# Altium PCB projet_pcb_naked_g431.PCBDOC
Units mil, origin at the board's own origin, x right, y up, seen from the top; angles counter-clockwise.
Board outline 2785 x 2050 mil, 2 copper layers (TopLayer, BottomLayer); 41 components, 32 nets, 152 pads, 42 vias.
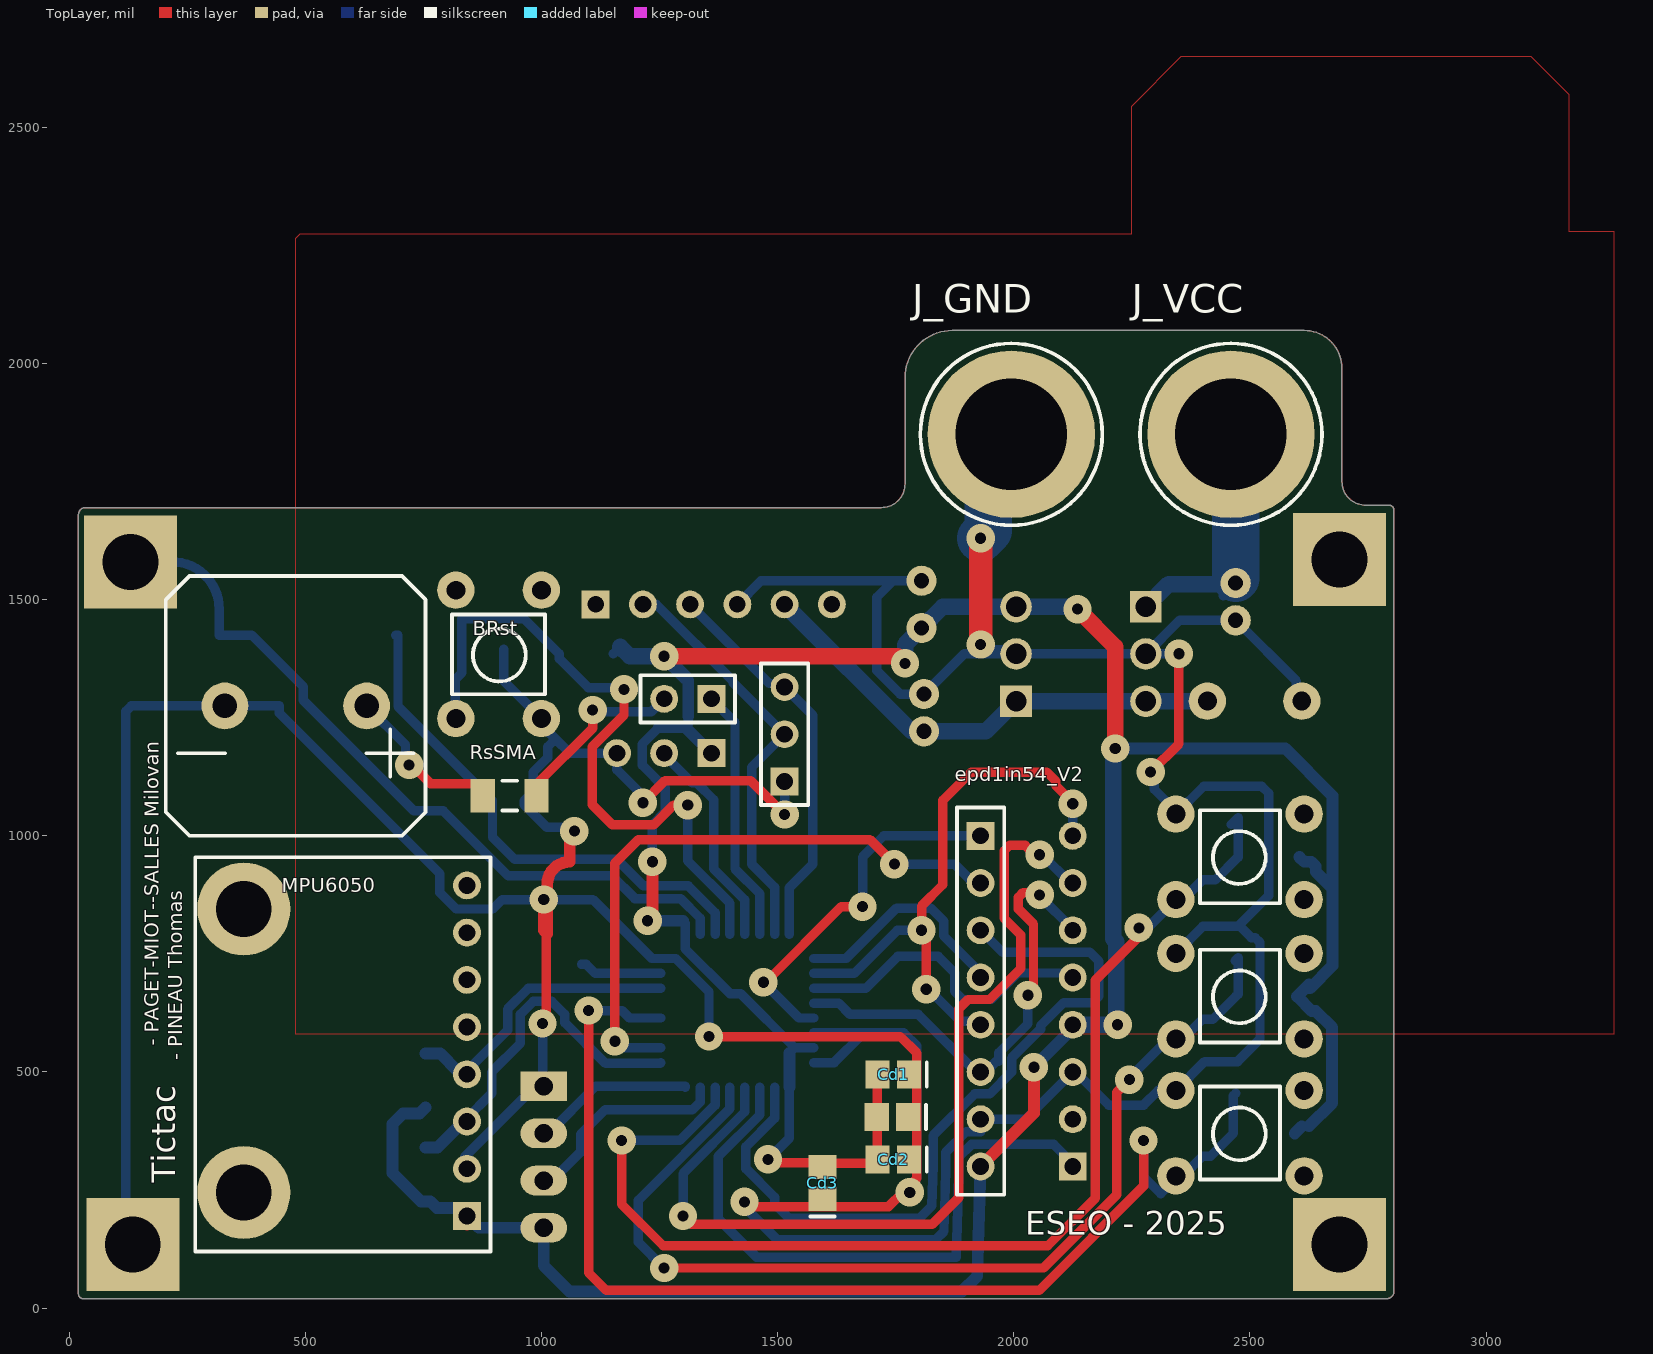
[diagram p0: TopLayer view]
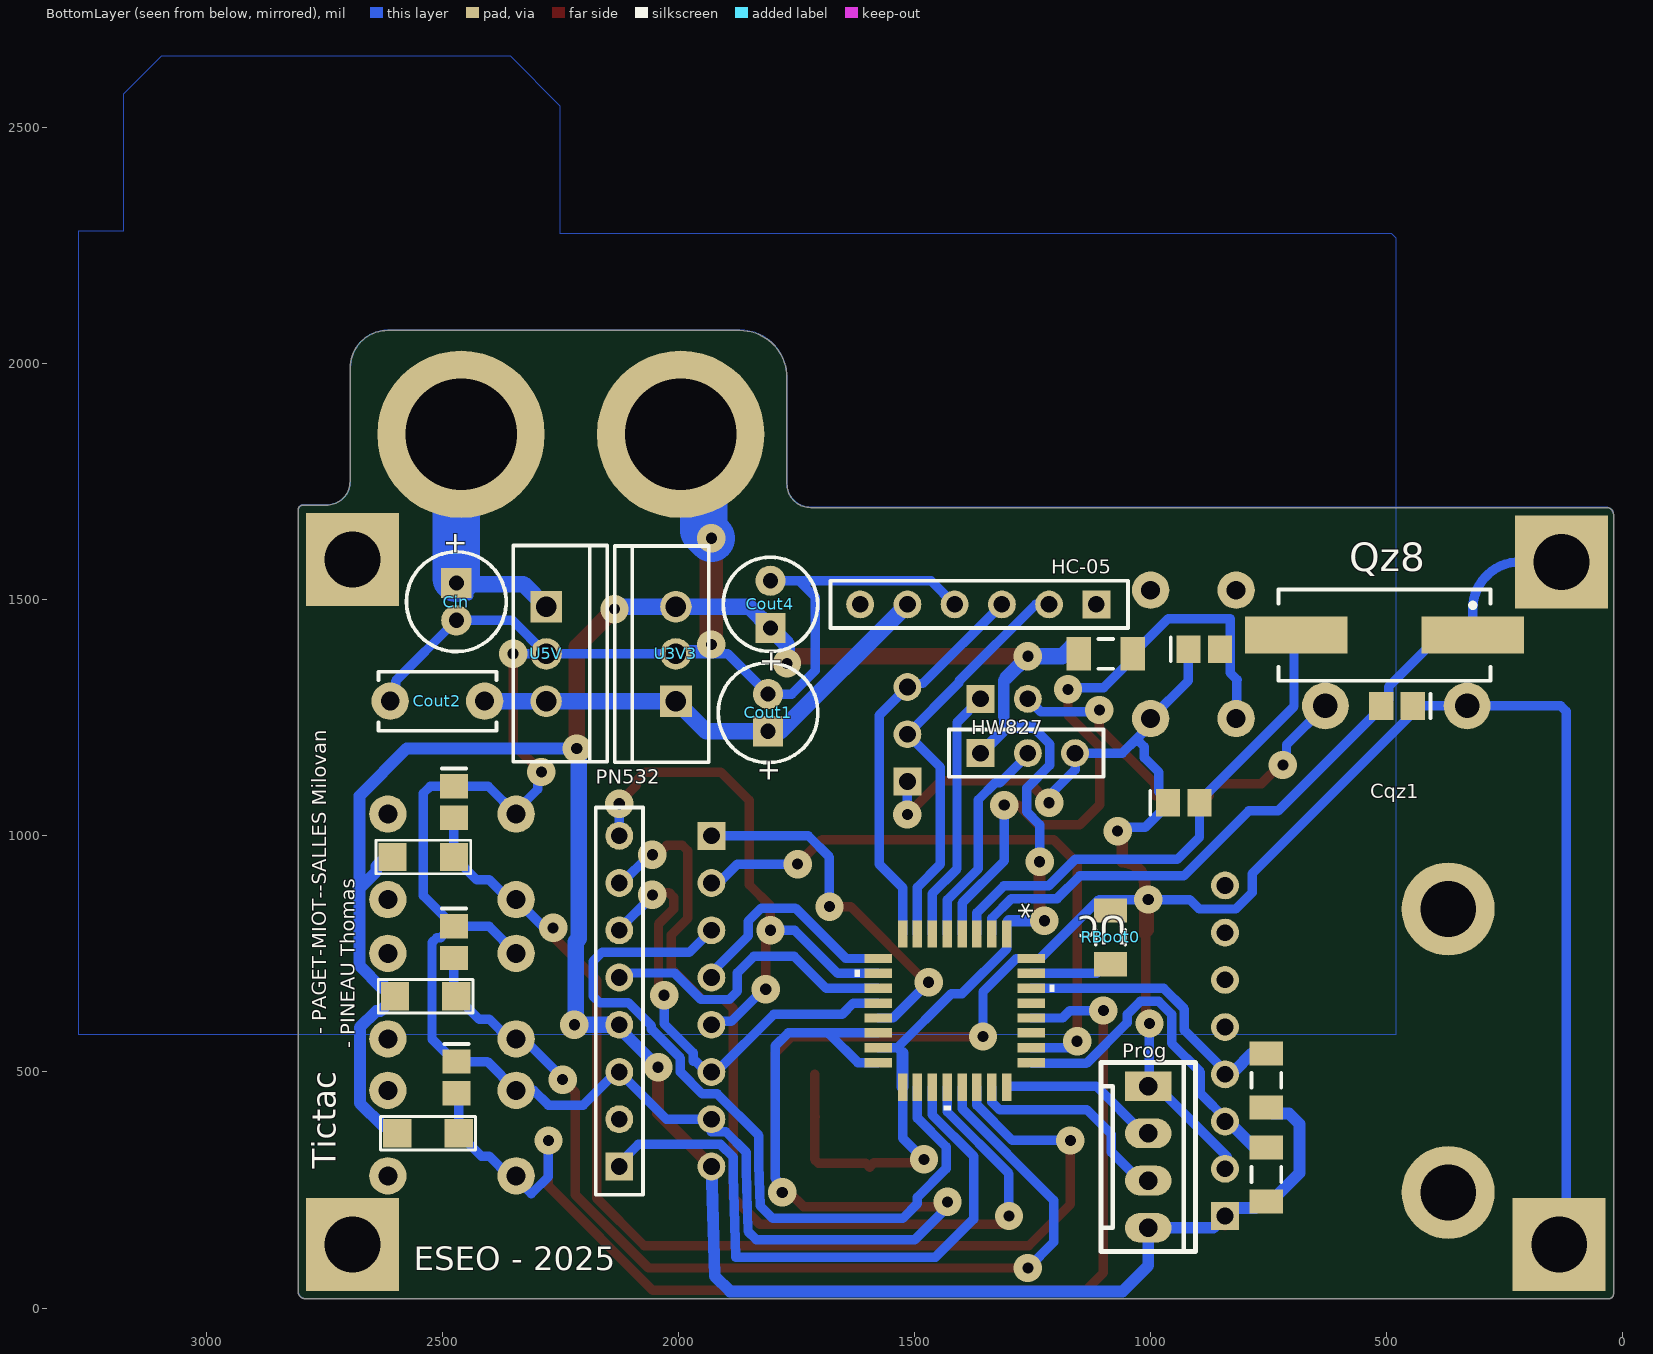
[diagram p1: BottomLayer view, seen from below]
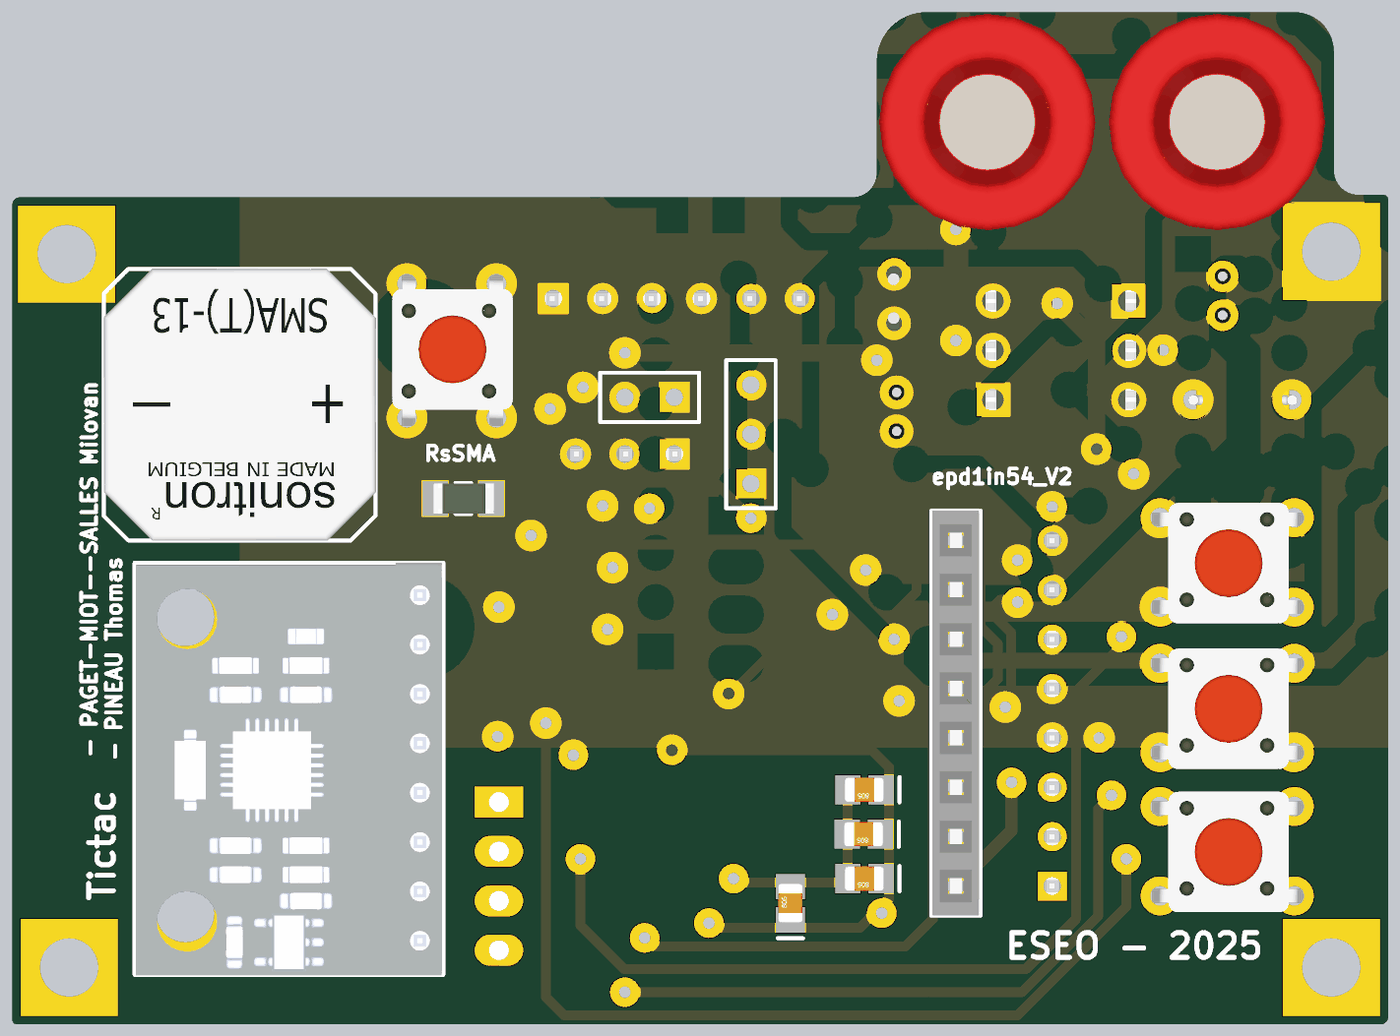
[diagram p2: 3D render of the assembled board from above, using the file's embedded part models]
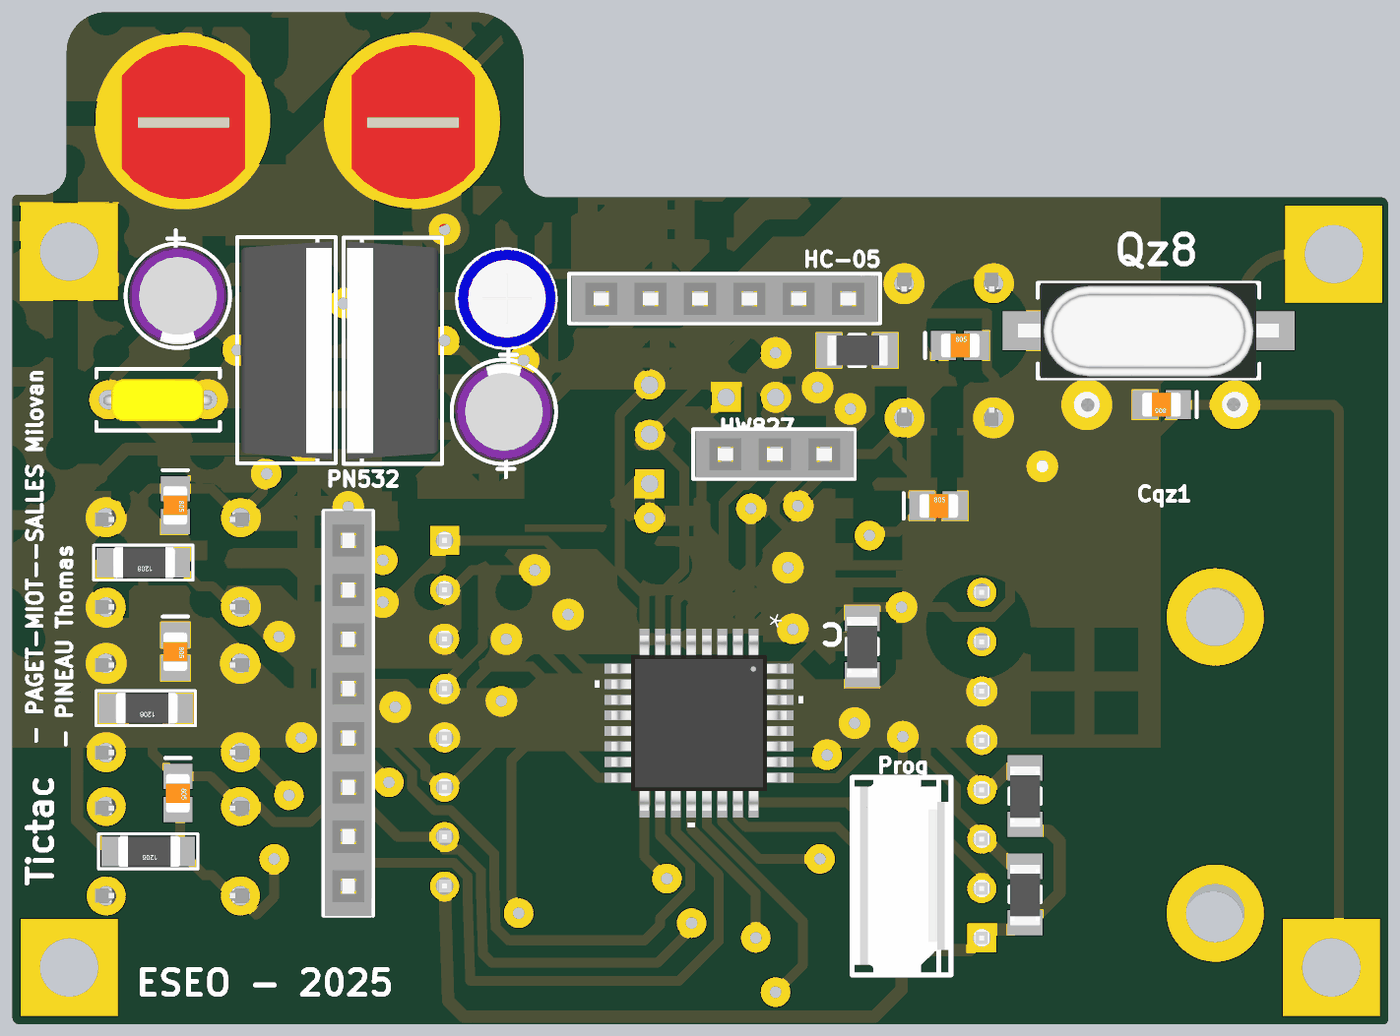
[diagram p3: 3D render of the assembled board from below, using the file's embedded part models]

## Layer stack, top to bottom
TopSolder: solder mask 0.4, Solder Resist, Dk 3.5
TopLayer: signal copper 1.4
Dielectric1: core 12.6, FR-4, Dk 4.8
BottomLayer: signal copper 1.4
BottomSolder: solder mask 0.4, Solder Resist, Dk 3.5

## Board outline
1720,1695 ccw(c1720,1745) 1770,1745 1770,1970 cw(c1870,1970) 1870,2070 2615,2070 cw(c2615,1990) 2695,1990 2695,1750 ccw(c2745,1750) 2745,1700 2795,1700 cw(c2795,1690) 2805,1690 2805,35 cw(c2790,35) 2790,20 30,20 cw(c30,30) 20,30 20,1680 cw(c35,1680) 35,1695

## Design rules (kind name [scope] priority, off if disabled: settings)
Clearance PowerPlaneClearance [InNamedPolygon('Bot-GND') Or  InNamedPolygon('Top-GND')] p1: gap=10 ignorepadtopadclearanceinfootprint=FALSE
Clearance [All] p2: gap=7 ignorepadtopadclearanceinfootprint=TRUE
FabricationTestPointUsage TestPointUsage [All] p1: valid=0 allowmultiple=FALSE
FabricationTestpoint Testpoint [All] p1: side=3 testpointundercomponent=TRUE minsize=40 maxsize=100 preferedsize=60 minholesize=20 maxholesize=40 preferedholesize=32 testpointgrid=1 allowsidetop=TRUE allowsidebottom=TRUE usegrid=TRUE gridtolerance=0.01
Height [All] p1: minheight=0 maxheight=2000 prefheight=500
HoleSize [All] p1: absolutevalues=TRUE maxlimit=300 minlimit=11.81 maxpercent=80.000 minpercent=20.000
PlaneClearance [All] p1: clearance=40
PlaneConnect [All] p1: planeconnectstyle=Relief reliefexpansion=19.68 reliefentries=4 reliefconductorwidth=40 reliefairgap=19.68
PolygonConnect [All] p1: connectstyle=Relief reliefconductorwidth=40 reliefentries=4 polygonreliefangle="90 Angle" airgapwidth=10
RoomDefinition projet_pcb_naked_g431 [InComponentClass('projet_pcb_naked_g431')] p1: confinementstyle=ConfineIn formatcopy=TRUE lockcomponents=FALSE outline 4610,-485 5950,-485 5950,-580 4610,-580
RoutingVias [All] p1: holewidth=23.62 width=60 viastyle="Through Hole" minholewidth=23.62 minwidth=60 maxholewidth=23.62 maxwidth=60
SilkToSolderMaskClearance SilkscreenOverComponentPads [IsPad] p1: minsilkscreentomaskgap=10 clearancetoexposedcopper=TRUE
SolderMaskExpansion [All] p1: expansion=2
Width [All] p1: maxlimit=1000 minlimit=12 preferedwidth=40
23 further rules are at their usual default settings.

## Classes and differential pairs
component class projet_pcb_naked_g431: BRst Cd1 Cd2 Cd3 Cin Cout1 Cout2 Cout4 Cqz1 epd1in54_V2 HC-05 HW827 J_GND J_VCC PN532 Prog Qz8 RBoot0 U5V Uc

## Components (designator, comment, footprint, x,y, rotation, side; value= is the part's Value field where it differs from the comment)
B0 "BOUTON_POUSSOIR_MINIATURE_TRAVERSANT" BOUTON_POUSSE_PLAT_6x6 2327.6,1053.98 r270 top
B1 "BOUTON_POUSSOIR_MINIATURE_TRAVERSANT" BOUTON_POUSSE_PLAT_6x6 2327.6,758.98 r270 top
B2 "BOUTON_POUSSOIR_MINIATURE_TRAVERSANT" BOUTON_POUSSE_PLAT_6x6 2327.6,468.98 r270 top
BRst "BOUTON_POUSSOIR_MINIATURE_TRAVERSANT" BOUTON_POUSSE_PLAT_6x6 811.02,1232.6 r0 top
CB0 "Condensateur 0805" C0805_N 2475,1071.54 r270 bottom value=100nF
CB1 "Condensateur 0805" C0805_N 2475,775 r270 bottom value=100nF
CB2 "Condensateur 0805" C0805_N 2470,488.46 r270 bottom value=100nF
Cd1 "Condensateur 0805" C0805_N 1745,495 r180 top value=100nF
Cd2 "Condensateur 0805" C0805_N 1745,315 r180 top value=100nF
Cd3 "Condensateur 0805" C0805_N 1595,265 r90 top value=100nF
CdRst "Condensateur 0805" C0805_N 886.54,1395 r180 bottom value=100nF
CdSWD "Condensateur 0805" C0805_N 1743.46,405 r180 top value=100nF
Cin "CONDENSATEUR_POL_ELECTROLY_RAD_2.0/5.08" CONDENSATEUR_POLARISE_ELECTROLYTIQUE_RADIAL_2.0/5.08 2470,1495.63 r270 bottom value=10µF/>25V
Cout1 "CONDENSATEUR_POL_ELECTROLY_RAD_2.0/5.08" CONDENSATEUR_POLARISE_ELECTROLYTIQUE_RADIAL_2.0/5.08 1810,1260.63 r90 bottom value=1µF/>10V
Cout2 "CONDENSATEUR_CER_RAD_5.08" CONDENSATEUR_CERAMIQUE_RADIAL_5.08 2610,1285 r180 bottom value=100nF
Cout4 "CONDENSATEUR_POL_ELECTROLY_RAD_2.54/5.08" CONDENSATEUR_POLARISE_ELECTROLYTIQUE_RADIAL_2.54/5.08 1805,1440 r90 bottom value=4.7µF/63V
Cqz1 "Condensateur 0805" C0805_N 478.46,1275 r0 bottom value=20pF
Cqz2 "Condensateur 0805" C0805_N 930,1070 r180 bottom value=20pF
epd1in54_V2 "BARRETTE_8 CONTACTS_1 RANGEE_FEMELLE_DROITE" BARRETTE_8_F_D 1930,1000 r270 top
HC-05 "BARRETTE_6 CONTACTS_1 RANGEE_FEMELLE_DROITE" BARRETTE_6_F_D 1115,1490 r0 bottom
HW827 "BARRETTE 3 CONTACTS 1 RANGEE FEMELLE DROITE" BARRETTE_3_F_D 1360,1175 r180 bottom
J_GND "DOUILLE BANANE 4mm" DOUILLE_BANANE_4mm 1995,1850 r270 top
J_VCC "DOUILLE BANANE 4mm" DOUILLE_BANANE_4mm 2460,1850 r270 top
MPU6050 "MPU6050" MPU6050 842.44,195 r270 top
PN532 "BARRETTE_8 CONTACTS_1 RANGEE_FEMELLE_DROITE" BARRETTE_8_F_D 2125,300 r90 bottom
Prog "BARRETTE4" HE14_4 1005,470 r270 bottom
Psma13 "Jumper SIP 2.54" HDR1X2 1360,1290 r180 top
Qz8 "Hz" HC49/4H_SMX 505,1425 r0 bottom
RBoot0 "100k" R1206_N 1085,785 r270 bottom
RpuB0 "RESISTANCE_CMS_1206" RESISTANCE_CMS_1206 2475,955 r0 bottom value=10k
RpuB1 "RESISTANCE_CMS_1206" RESISTANCE_CMS_1206 2470,660 r0 bottom value=10k
RpuB2 "RESISTANCE_CMS_1206" RESISTANCE_CMS_1206 2465,370 r0 bottom value=10k
RpuSCL "4.7k" R1206_N 755,282.91 r270 bottom
RpuSDA "4.7k" R1206_N 755,482.09 r270 bottom
Rrst "10k" R1206_N 1095,1385 r180 bottom
RsSMA "220" R1206_N 932.91,1085 r0 top
SMA13 "BUZZER_SMA13" BUZZER_SMA13 630,1275 r180 top value=SMA13
U3V3 "REGULATEUR_TO220_78XX" REGULATEUR_TO220_78XX 2005,1385 r90 bottom
U5V "REGULATEUR_TO220_78XX" REGULATEUR_TO220_78XX 2280,1385 r270 bottom
UART2 "BARRETTE3" HDR1X3 1515,1115 r90 top
Uc "STM32G431KBTx" LQFP-32 1415,630 r270 bottom value=Value

## Footprints (in the part's own frame and the unit in brackets; to place one, negate y for a bottom-side part, rotate by r counter-clockwise, add the part's x,y. Pads: shape width x height; smd on the part's side, far side on the other; paste and mask are expansions set on the pad)
BARRETTE_3_F_D [mm] "BARRETTE 3 CONTACTS ; 1 RANGEE ; DROITE ; FEMELLE ; ESPACEMENT BROCHES = 2.54 mm"
  rect 1.5x1.5 hole 0.9: 1(0,0)
  round 1.5 hole 0.9: 2(2.54,0) 3(5.08,0)
  silkscreen extent -1.7,-1.27 6.61,1.27, body extent -1.56,-1.21 6.56,1.2, height 8.5
BARRETTE_6_F_D [mm] "BARRETTE 6 CONTACTS ; 1 RANGEE ; DROITE ; FEMELLE ; ESPACEMENT BROCHES = 2.54 mm"
  rect 1.5x1.5 hole 0.9: 1(0,0)
  round 1.5 hole 0.9: 2(2.54,0) 3(5.08,0) 4(7.62,0) 5(10.16,0) 6(12.7,0)
  silkscreen extent -1.7,-1.27 14.3,1.27, body extent -1.57,-1.2 14.17,1.21, height 8.5
BARRETTE_8_F_D [mm] "BARRETTE 8 CONTACTS ; 1 RANGEE ; DROITE ; FEMELLE ; ESPACEMENT BROCHES = 2.54 mm"
  rect 1.5x1.5 hole 0.9: 1(0,0)
  round 1.5 hole 0.9: 2(2.54,0) 3(5.08,0) 4(7.62,0) 5(10.16,0) 6(12.7,0) 7(15.24,0) 8(17.78,0)
  silkscreen extent -1.53,-1.27 19.3,1.27, body extent -1.53,-1.21 19.3,1.2, height 8.5
BOUTON_POUSSE_PLAT_6x6 [mil] "BOUTON POUSSOIR MINIATURE ON/OFF; BOUTON PLAT/LONG ; ESPACEMENT BROCHES = 7.62mm/5.08mm"
  round 79 hole 40: 1(7.87,15.75) 2(188.98,15.75) 3(188.98,287.4) 4(7.87,287.4)
  silkscreen extent 0,67 197,236, body extent -22,-1 222,310, height 276
BUZZER_SMA13 [mil] "BUZZER SMA13 ; DIMENSIONS :13.96mm x 13.96mm ; ESPACEMENT BROCHES : 7.62mm"
  round 99 hole 52: 1(0,0) 2(300,0)
  silkscreen extent -125,-275 425,275, body extent -126,-276 425,276, height 256
C0805_N [mm] "Chip Capacitor, Body 2.0x1.3mm, IPC Medium Density"
  rect 1.3x1.5 smd: 1(-0.85,0) 2(0.85,0)
  silkscreen extent -1.8,-0.65 -1.8,0.65, body extent -0.99,-0.62 1.01,0.63, height 0.8
CONDENSATEUR_CERAMIQUE_RADIAL_5.08 [mil] "CONDENSATEUR TRAVERSANT CERAMIQUE RADIAL ; DIMENSIONS : 3.17mm x 5.08mm"
  round 79 hole 40: 1(0,0) 2(200,0)
  silkscreen extent -25,-63 225,62, body extent -11,-43 209,42, height 148
CONDENSATEUR_POLARISE_ELECTROLYTIQUE_RADIAL_2.0/5.08 [mil] "CONDENSATEUR POLARISE ELECTROLYTIQUE RADIAL ; DIAMETRE : 5.08mm ; ESPACEMENT BROCHES : 2mm"
  rect 64x64 / inner round 64 / far side round 64 hole 32: 1(-39.37,0)
  round 64 hole 32: 2(39.37,0)
  silkscreen extent -106,-106 106,105, body extent -98,-98 98,98, height 433
CONDENSATEUR_POLARISE_ELECTROLYTIQUE_RADIAL_2.54/5.08 [mil] "CONDENSATEUR_POLARISE_ELECTROLYTIQUE_RADIAL ; DIAMETRE : 5.08mm ; ESPACEMENT BROCHES : 2.54mm"
  rect 64x64 / inner round 64 / far side round 64 hole 32: 1(0,0)
  round 64 hole 32: 2(100,0)
  silkscreen extent -50,-100 150,100, body extent -50,-101 149,98, height 446
DOUILLE_BANANE_4mm [mm] "DOUILLE BANANE ; DIAMETRE PASSAGE CONTACT = 4 mm ; DIAMETRE PERCAGE = 6 mm"
  round 9 hole 6: 1(0,0)
  silkscreen extent -4.89,-4.89 4.89,4.89, body extent -5.5,-5.6 5.63,5.53, height 4.79
HC49/4H_SMX [mm] "Quartz Crystal, SM; Body 13.4 (inc. leads) x 4.9 mm (LxW max)"
  rect 5.5x2 smd: 1(-4.75,0) 2(4.75,0)
  silkscreen extent -5.7,-2.45 5.7,2.45, body extent -6.7,-2.45 6.7,2.45, height 5.08
HDR1X2 [mm] "Connector; Header; 2 Position"
  rect 1.5x1.5 hole 0.9: 1(0,0)
  round 1.5 hole 0.9: 2(2.54,0)
  silkscreen extent -1.27,-1.27 3.81,1.27
HDR1X3 [mm] "Connector; Header; 3 Position"
  rect 1.5x1.5 hole 0.9: 1(0,0)
  round 1.5 hole 0.9: 2(2.54,0) 3(5.08,0)
  silkscreen extent -1.27,-1.27 6.35,1.27
HE14_4 [mm] "Connector; HE14; 4 Position; Pin Spacing=2.54mm"
  rect 1.6x2.5 hole 1: 1(0,0)
  oval 1.6x2.5 hole 1: 2(2.54,0) 3(5.08,0) 4(7.62,0)
  silkscreen extent -1.27,-2.54 8.89,2.54, body extent -1.3,-2.45 8.86,2.55, height 11.42
LQFP-32 [mil]
  rect 58x20 smd paste+0 mask+0: 1(-162,110.24) 2(-162,78.74) 3(-162,47.24) 4(-162,15.75) 5(-162,-15.75) 6(-162,-47.24) 7(-162,-78.74) 8(-162,-110.24) 17(162,-110.24) 18(162,-78.74) 19(162,-47.24) 20(162,-15.75) 21(162,15.75) 22(162,47.24) 23(162,78.74) 24(162,110.24)
  rect 20x58 smd paste+0 mask+0: 9(-110.24,-162) 10(-78.74,-162) 11(-47.24,-162) 12(-15.75,-162) 13(15.75,-162) 14(47.24,-162) 15(78.74,-162) 16(110.24,-162) 25(110.24,162) 26(78.74,162) 27(47.24,162) 28(15.75,162) 29(-15.75,162) 30(-47.24,162) 31(-78.74,162) 32(-110.24,162)
  silkscreen extent -86,-211 211,211, body extent -177,-177 177,177, height 63
MPU6050 [mm]
  rect 1.5x1.5 hole 0.9: 1(0,0)
  round 1.5 hole 0.9: 2(-2.54,0) 3(-5.08,0) 4(-7.62,0) 5(-10.16,0) 6(-12.7,0) 7(-15.24,0) 8(-17.78,0)
  round 5 hole 3: FIX(-16.51,-12) FIX(-1.27,-12)
  silkscreen extent -19.3,-14.61 1.91,1.27, body extent -19.3,-14.54 1.93,1.33, height 14.7
R1206_N [mm] "Chip Resistor, Body 3.2x1.6mm, IPC Medium Density"
  rect 1.3x1.8 smd: 1(-1.45,0) 2(1.45,0)
  silkscreen extent -0.4,-0.8 0.4,0.8, body extent -1.68,-0.87 1.68,0.87, height 0.71
REGULATEUR_TO220_78XX [mm] "BOITIER TO220 ; DIMENSIONS : 11.2mm x 4.7mm ; ESPACEMENT BROCHES : 2.54 mm"
  rect 1.7x1.7 hole 1.1: 1(-2.54,0)
  round 1.7 hole 1.1: 2(0,0) 3(2.54,0)
  silkscreen extent -5.83,-1.77 5.8,3.29, body extent -5.61,-1.59 5.61,3.1, height 19.33
RESISTANCE_CMS_1206 [mil] "RESISTANCE CMS 1206 ; DIMENSIONS : 3.2mm x 1.6mm"
  rect 60x60 smd: 1(0,0) 2(130,0)
  silkscreen extent -35,-35 165,35, body extent 0,-31 126,31, height 39

## Part data
B0 B1 B2 BRst: "BOUTON POUSSOIR MINIATURE TRAVERSANT ON/OFF", Type=B_POUSS_MINI_T
CB0 CB1 CB2 Cd1 Cd2 Cd3 CdRst CdSWD Cqz1 Cqz2: library part CONDENSATEUR_CER_RAD_5.08, Type=RADIAL_5.08
Cin Cout1: "CONDENSATEUR POLARISE ELECTROLYTIQUE RADIAL 2.0/5.08", Type=POL_RAD_2.0/5.08
Cout2: "CONDENSATEUR TRAVERSANT CERAMIQUE RADIAL 5.08mm", Type=RADIAL_5.08
Cout4: "CONDENSATEUR POLARISE ELECTROLYTIQUE RADIAL 2.54/5.08", Type=POL_RAD_2.54/5.08
HC-05: "BARRETTE 6 CONTACTS 1 RANGEE FEMELLE DROITE", Type=F_D_6
HW827: library part "BARRETTE_3 CONTACTS_1 RANGEE_FEMELLE_DROITE", Type=F_D_3
J_GND J_VCC: library part DOUILLE_BANANE_4mm, "DOUILLE BANANE 4 mm", Type=BANANE_4mm
Prog: "Header, 4-Pin", LatestRevisionDate=17-Jul-2002, LatestRevisionNote="Re-released for DXP Platform.", Publisher="Altium Limited"
Psma13: library part "Jumper SIP2.54", "Jumper SIP2.54"
Qz8: library part Quartz, "Crystal Oscillator", LatestRevisionDate=17-Jul-2002, LatestRevisionNote="Re-released for DXP Platform.", PackageReference=R38, Published=8-Jun-2000, Publisher="Altium Limited"
RBoot0 RpuSCL RpuSDA Rrst RsSMA: library part Resistor, "Resistor", LatestRevisionDate=17-Jul-2002, LatestRevisionNote="Re-released for DXP Platform.", PackageReference=AXIAL-0.5, Published=8-Jun-2000, Publisher="Altium Limited"
RpuB0 RpuB1 RpuB2: "RESISTANCE CMS 1206", Type=CMS_1206
SMA13: "BUZZER SMA13", Type=BUZZER
U3V3 U5V: "REGULATEUR DE TENSION POSITIVE 78XX BOITIER TO220", Package=(TO220)
  U3V3: Type=LF33CV
  U5V: Type=7805
UART2: "Header, 3-Pin", LatestRevisionDate=17-Jul-2002, LatestRevisionNote="Re-released for DXP Platform.", Publisher="Altium Limited"
Uc: "Mainstream Arm Cortex-M4 core with DSP and FPU, 170MHz with 128Kbytes of Flash memory, Math Accelerator, Medium Analog level integration", Manufacturer_Part_Number=stm32g4_lqfp32_t1, Built_By=EMA_Jessica, Copyright="Copyright (C) 2016 Accelerated Designs. All rights reserved", RefDes=RefDes, Type=DEV, Vendor=STMicroelectronics
epd1in54_V2 PN532: Type=F_D_8

## Free pads (board coordinates)
  rect 196.85x196.85 hole 118.11: 1(130,1580) 2(2690,135) 3(135,135) 4(2690,1585)

## Via types
v1: diameter 60, hole 23.62, TopLayer to BottomLayer, 42 vias

## Nets (pads, with @x,y where several pads share a name; then routed paths per layer and width w, separated by ;. In a path a pad name is that pad's centre, name@x,y a point inside that pad or via, vN(x,y) a via of type N, cw(c..) or ccw(c..) an arc to the next point about the centre after c; other vN are vias at no path point)
+3V3: Cd1.2 Cd2.2 Cd3.2 CdSWD.2 Cout4.1 epd1in54_V2.8 HW827.1 MPU6050.1 PN532.4 Prog.4 RpuB0.2 RpuB1.2 RpuB2.2 RpuSCL.2 RpuSDA.2 Rrst.1 U3V3.3 Uc.1 Uc.15 Uc.17 | length 7705.9
  TopLayer w20: v1(1480,315) 1487.65,307.35 1586.12,307.35 Cd3.2 1603.27,306.73 1703.27,306.73 Cd2.2 1710.77,315.77 1710.77,404.23 CdSWD.2 1710.77,405.77 1710.77,494.23 Cd1.2
  TopLayer w25: MPU6050.1@827.5,187.5 830,190 MPU6050.1@842.73,177.27 ; Prog.4@997.73,177.27 Prog.4 ; v1(1225,820) 1235,830 v1(1235,945) ; epd1in54_V2.8 2042.72,412.72 v1(2042.72,510)
  TopLayer w35: v1(1260,1380) 1755,1380 v1(1770,1365) ; v1(2135,1480) 2215,1400 v1(2215,1185)
  BottomLayer w20: Rrst.1 Rrst.1@1167.09,1400 ; v1(1235,945) 1235,1023.53 1262,1050.53 1262,1101.18 1213.47,1149.71 1213.47,1194.27 1249.2,1230 ; Uc.1@1300,820 1304.76,815.24 Uc.1 1304.76,760.45 1399.38,665.84 1421.93,665.84 1536.51,551.26 ; 1305,1230 1310.97,1235.97 1310.97,1252.4 ; v1(1480,315) 1525.24,360.24 Uc.17 ; 1525.24,539.98 1536.51,551.26 ; Uc.15 1536.51,551.26 ; v1@2130,1485 v1(2135,1480) ; v1@2217.5,602.5 v1(2220,600)
  BottomLayer w25: RpuSDA.2 741.91,411.91 706.91,411.91 685,390 685,285.98 745.16,225.83 RpuSCL.2 764.84,225.83 778.64,212.03 825.41,212.03 MPU6050.1 867.44,170 Prog.4 1005,90.06 1059.56,35.5 1890.5,35.5 1922.74,67.74 epd1in54_V2.8 ; v1(1225,820) Uc.1@1300,820 ; 1249.2,1230 1305,1230 HW827.1 ; 1305,1335 1310.97,1329.03 1310.97,1252.4 ; Uc.17 1525.24,539.98 ; v1(2042.72,510) 2125,592.28 PN532.4 ; v1(2215,1185) 2575,1185 2675,1085 2675,725 2627.5,677.5 RpuB1.2@2617.5,677.5 ; RpuB2.2 RpuB2.2@2610,385 ; RpuB0.2 2615,945 2630,945 2639.44,935.56 2639.44,924 2674,889.44 ; 2625,385 2674,434 2674,594.44 2639.44,629 2631,629 RpuB1.2 RpuB1.2@2617.5,677.5 ; RpuB1.2@2625,685 RpuB1.2@2617.5,677.5
  BottomLayer w30: v1(1260,1380) 1305,1335
  BottomLayer w35: Rrst.1@1167.09,1400 1187.09,1380 v1(1260,1380) ; v1(1770,1365) 1770,1405 Cout4.1 1850,1485 U3V3.3 v1@2130,1485 ; PN532.4 v1(2220,600) ; v1(2215,1185) 2210.5,1180.5 2210.5,782.43 2217.5,775.43 v1@2217.5,602.5
+5V: Cout1.1 Cout2.2 HC-05.5 U3V3.1 U5V.3 | length 1032.7
  BottomLayer w20: HC-05.5 HC-05.5@1522.47,1482.53
  BottomLayer w35: HC-05.5@1522.47,1482.53 1783.74,1221.26 Cout1.1 1941.26,1221.26 U3V3.1 U5V.3 Cout2.2
GND: B0.1 B1.1 B2.1 BRst.2 CB0.1 CB1.1 CB2.1 Cd1.1 Cd2.1 Cd3.1 CdRst.1 CdSWD.1 Cin.2 Cout1.2 Cout2.1 Cout4.2 Cqz1.1 Cqz2.1 epd1in54_V2.7 HC-05.4 HW827.3 J_GND.1 MPU6050.2 pad.3 pad.4 PN532.3 Prog.1 RBoot0.1 SMA13.2 U3V3.2 U5V.2 UART2.1 Uc.14 Uc.16 Uc.32 | length 11928.6
  TopLayer w20: v1(1002.5,602.5) 1010,610 1010,790 1012.5,792.5 ; Prog.1 Prog.1@1015,480 ; v1(1215,1070) 1262,1117 1443,1117 v1(1515,1045) ; v1(1355,575) 1760,575 1795,540 1795,455 1795,405 1795,370 1795,315 1795,275 1780,260 v1(1780,245) 1765,245 1735,215 1450.82,215 1440.82,225 v1(1430,225) ; UART2.1@1513,1117 UART2.1 ; U5V.2 U5V.2@2280.3,1385.3 ; v1(2290,1135) 2349.69,1194.69 v1(2349.69,1385.59)
  TopLayer w25: v1(1005,865) 1005,800 1012.5,792.5 1012.5,897.5 cw(c1060,897.5) 1060,945 1060,1000 v1(1070,1010)
  TopLayer w50: v1(1930,1405) v1(1930,1630)
  TopLayer w60: U3V3.2@2003.12,1385 U3V3.2
  TopLayer w100: J_GND.1@1946.34,1801.34 J_GND.1
  BottomLayer w20: pad.3 120,150 120,1263.28 131.72,1275 SMA13.2 Cqz1.1 445,1260 785,920 785,880 820,845 897.09,845 917.09,865 v1(1005,865) 1109.24,865 1234,740.24 Uc.32 1284.55,740.24 1355,669.78 v1(1355,575) ; MPU6050.2@830,290 837.47,297.47 MPU6050.2@837.47,299.97 ; MPU6050.2 MPU6050.2@837.47,299.97 ; CdRst.1 920,1328.35 BRst.2 1000,1235 1030,1205 ; v1(1002.5,602.5) 1002.5,472.5 Prog.1 987.28,470 837.47,320.19 MPU6050.2@837.47,299.97 ; v1(1070,1010) 1062.35,1017.65 1011.87,1017.65 963.46,1066.06 Cqz2.1 963.46,1073.94 982.48,1092.95 982.48,1134.41 1013.66,1165.59 1013.66,1188.66 1030,1205 ; v1(1215,1070) 1207.35,1077.65 1207.35,1092.65 1160,1140 HW827.3 1060,1175 1030,1205 ; HC-05.4 1465,1540 1745,1540 ; v1(1430,225) 1430,214.18 1499.18,145 1835,145 1852.43,162.43 1856.47,291.91 1856.47,330.46 1899.54,373.53 1930,373.53 epd1in54_V2.7 2025,400 PN532.3 2131.39,500 2201.39,430 2275,430 2306.1,461.1 B2.1 2404.17,521.93 CB2.1 2473.94,521.93 2521.53,569.52 2521.53,774.17 2511.57,784.13 2503.28,784.13 2478.94,808.46 CB1.1 ; v1(1515,1045) UART2.1 ; Uc.16 1619.76,519.76 1680,580 ; Uc.14 1767.24,582.76 1795,555 1795,275 1780,260 v1(1780,245) ; Cout4.2 1745,1540 ; v1(1930,1405) 1940.82,1405 1951.84,1393.98 1996.02,1393.98 U3V3.2 ; v1(2290,1135) 2297.65,1127.35 2297.65,1098.7 2343.35,1053 B0.1 2402.24,1105 CB0.1 2525,1105 2540,1090 2540,873.46 CB1.1 ; B1.1 2400.71,808.46 CB1.1 ; v1(2349.69,1385.59) 2349.09,1385 U5V.2 ; Cout2.1 2598.71,1296.29 2598.71,1327.55 Cin.2 2351.26,1456.26 U5V.2 ; 1745,1540 1710,1505 1710,1350 1760,1300 Cout1.2 1895,1385 U3V3.2 ; U3V3.2 U5V.2
  BottomLayer w100: v1(1930,1630) 1946.34,1646.34 1946.34,1801.34 J_GND.1
NetPsma13_2: Psma13.2 RsSMA.2 | length 394.7
  TopLayer w20: RsSMA.2 990,1108.98 1108.5,1227.48 v1(1108.5,1266.5)
  BottomLayer w20: v1(1108.5,1266.5) 1112,1263 1233,1263 Psma13.2
NetRsSMA_1: RsSMA.1 SMA13.1 | length 372.2
  TopLayer w20: SMA13.1@630,1255 SMA13.1@645.12,1239.88 ; v1(720,1150) 725.72,1150 765.29,1110.43 860.24,1110.43 875.83,1094.84 RsSMA.1
  BottomLayer w20: SMA13.1 712.35,1192.65 712.35,1157.65 v1(720,1150)
PA0_capteur_de_pouls-ADC1_IN1: HW827.2 Uc.5 | length 459.6
  BottomLayer w20: HW827.2 1260,1171.47 1319.47,1112 1329.47,1112 1365,1076.47 1365,930 1430.75,864.25 Uc.5
PA1_buzzer: Psma13.1 Uc.6 | length 540.4
  BottomLayer w20: Psma13.1 1410,1240 1410,930 1462.24,877.76 Uc.6
PA2_bluetooth-UART2_TX: HC-05.2 UART2.2 Uc.7 | length 887.9
  BottomLayer w20: HC-05.2 1243.1,1490 1406.53,1326.57 1406.53,1323.47 UART2.2 1445,1145 1445,940 1493.74,891.26 Uc.7
PA3_bluetooth-UART2_RX: HC-05.3 UART2.3 Uc.8 | length 841
  BottomLayer w20: HC-05.3 1482.53,1322.47 1507.53,1322.47 UART2.3 1575,1255 1575,940 1525.24,890.24 Uc.8
PA4_e-paper-CS: epd1in54_V2.4 Uc.9 | length 482.4
  BottomLayer w20: Uc.9 1645.24,740.24 1752,847 1824.47,847 1852,819.47 1852,788 1930,710 epd1in54_V2.4
PA5_e-paper-transmetteur_NFC-CLK: epd1in54_V2.5 PN532.8 Uc.10 | length 1237.3
  TopLayer w20: v1(1815,675) 1815,790 v1(1805,800) 1805,851.25 1850,896.25 1850,1075 1910,1135 2070,1135 2089.06,1115.94 2089.06,1106.6 2125,1070.67 v1(2125,1067.96)
  BottomLayer w20: Uc.10 1662.49,708.74 1753.75,800 v1(1805,800) ; v1(1815,675) 1820,675 1887.53,607.47 1922.53,607.47 epd1in54_V2.5 ; PN532.8 v1(2125,1067.96)
PA6_transmetteur_NFC-SS: PN532.5 Uc.11 | length 664.1
  BottomLayer w20: Uc.11 1687.24,677.24 1755,745 1840,745 1875,710 1875,670.82 1892.34,653.47 1952,653.47 2008.03,709.5 2115.5,709.5 PN532.5
PA7_e-paper-transmetteur_NFC-DIN/MOSI: epd1in54_V2.6 PN532.6 Uc.12 | length 1017.8
  TopLayer w20: v1(2030,662.5) 2030,665 2042,677 2042,813 2010,845 2010,870 2020,880 2050,880 v1(2055,875) ; PN532.6@2115,800 PN532.6
  BottomLayer w20: Uc.12 1629.6,645.75 1653.35,622 1798,622 1920,500 epd1in54_V2.6 1940.57,500 1962.91,522.35 1968.72,522.35 1968.72,540.65 2030,601.93 v1(2030,662.5) ; v1(2055,875) 2055,872.5 2125,802.5 PN532.6
PA8_e-paper-DC: epd1in54_V2.3 Uc.18 | length 1648.5
  BottomLayer w20: Uc.18 1493.74,402.31 1433,341.57 1433,295.53 1493.74,234.79 1493.74,221.26 1525,190 1800,190 1826.77,216.77 1829.47,303.1 1829.47,365.27 1917.67,453.47 1949.27,453.47 1995.72,499.92 1995.72,529.47 2057,590.75 2057,597.8 2105.73,646.53 2166.53,646.53 2180,660 2180,734.81 2161.34,753.47 1976.53,753.47 epd1in54_V2.3
PA9_transmetteur_NFC-RST: PN532.1 Uc.19 | length 1339.2
  BottomLayer w20: Uc.19 1462.24,409 1375,321.76 1375,188.53 1455.46,108.08 1878.08,108.08 1883.47,280.73 1883.47,319.27 1910.73,346.53 2085,346.53 2125,306.53 PN532.1
PA10_transmetteur_NFC-SPI-MISO: PN532.7 Uc.20 | length 1954.3
  TopLayer w20: v1(1300,195) 1317,178 1828,178 1883.47,233.47 1883.47,633.47 1903.47,653.47 1949.27,653.47 2015,719.2 2015,790 1980,825 1980,968.28 1991.72,980 2024.18,980 2044.18,960 v1(2055,960)
  BottomLayer w20: v1(1300,195) 1300,284.94 1430.75,415.69 Uc.20 ; v1(2055,960) 2060,960 2120,900 PN532.7
PA11_bouton_MID: B1.2 CB1.2 RpuB1.1 Uc.21 | length 2155.6
  TopLayer w20: v1(1260,85) 2063.18,85 2218,239.82 2218,456.81 v1(2245,483.81)
  BottomLayer w20: v1(1260,85) 1205,140 1205,228.12 1399.25,422.38 Uc.21 ; v1(2245,483.81) 2245,487.62 2327.38,570 B1.2 2358.2,570 2399.92,611.72 2421.72,611.72 RpuB1.1 2475,665 CB1.2 CB1.2@2469.17,735.71
PA12_bouton_DOWN: B0.2 CB0.2 RpuB0.1 Uc.22 | length 2468.5
  TopLayer w20: v1(1170,355) 1170,220 1258,132 2072,132 2173,233 2173,694.65 2265,786.65 v1(2265,805)
  BottomLayer w20: v1(1170,355) 1292.99,355 1367.76,429.77 Uc.22 ; v1(2265,805) 2283.35,805 B0.2 2358.2,865 2399.92,906.72 2426.72,906.72 RpuB0.1 CB0.2 CB0.2@2460.91,1023.98
PA13_SDWIO: Prog.3 Uc.23 | length 453.8
  BottomLayer w20: Prog.3 1022.72,270 1082.97,330.25 1082.97,367.97 1135,420 1206.82,420 1319.81,420 1336.26,436.45 Uc.23
PA14_SWDCLK: Prog.2 Uc.24 | length 343.2
  BottomLayer w20: Prog.2 1015,370 1115,470 1304.76,470 Uc.24
PA15_Accelerometre-I2C1-SCL: MPU6050.3 RpuSCL.1 Uc.25 | length 753.9
  BottomLayer w20: MPU6050.3@838.72,398.72 894.59,454.59 894.59,499.59 955.5,560.5 955.5,621.97 983.03,649.5 1021.97,649.5 1049.5,621.97 1049.5,604.65 1136.15,518 1251.24,518 Uc.25
  BottomLayer w25: RpuSCL.1 780,340 MPU6050.3@838.72,398.72
PB0_e-paper-BUSY: epd1in54_V2.1 Uc.13 | length 788.5
  TopLayer w20: v1(1470,690) 1475,690 1635,850 v1(1680,850)
  BottomLayer w20: v1(1470,690) 1470,689.71 1545.45,614.25 Uc.13 ; v1(1680,850) 1680,955 1725,1000 epd1in54_V2.1
PB3_e-paper-RST: epd1in54_V2.2 Uc.26 | length 1319.5
  TopLayer w20: v1(1155.62,565) 1155.62,942.09 1205.53,992 1695.5,992 v1(1747.5,940)
  BottomLayer w20: v1(1155.62,565) 1160.82,565 1174.56,551.26 Uc.26 ; v1(1747.5,940) 1875,940 1922.5,892.5 epd1in54_V2.2
PB4: Uc.27
PB5_bouton_UP: B2.2 CB2.2 RpuB2.1 Uc.28 | length 2517.7
  TopLayer w20: v1(1100,630) 1100,75 1137,38 2054.37,38 2275,258.63 v1(2275,355)
  BottomLayer w20: v1(1100,630) 1170.82,630 1186.57,614.25 Uc.28 ; v1(2275,355) 2275,278.34 2311.26,242.09 2343.35,274.17 B2.2 2358.2,280 2399.92,321.72 2416.72,321.72 RpuB2.1 2465,450 CB2.2
PB6: Uc.29
PB7_Accelerometre-I2C1-SDA: MPU6050.4 RpuSDA.1 Uc.30 | length 614.9
  BottomLayer w20: MPU6050.4@838.72,498.72 928.5,588.5 928.5,633.15 972.59,677.24 Uc.30
  BottomLayer w25: RpuSDA.1 785.83,539.17 823.48,501.52 835.92,501.52 MPU6050.4@838.72,498.72
PB8: RBoot0.2 Uc.31 | length 175.9
  BottomLayer w20: RBoot0.2 1094.84,727.91 1114.02,708.74 Uc.31
PF0_OSCIN: Cqz1.2 pad.1 Qz8.1 Uc.2 | length 1617.1
  BottomLayer w20: pad.1 217.99,1580 cw(c217.99,1480) 317.99,1480 Qz8.1 386.89,1425 496.34,1315.55 496.34,1286.65 730.26,1052.74 792.26,1052.74 930,915 1150,915 1198,867 1294.72,867 1336.26,825.46 Uc.2
PF1_OSCOUT: Cqz2.2 Qz8.2 Uc.3 | length 1098
  BottomLayer w20: Qz8.2 696.5,1425 696.5,1273.97 896.54,1073.94 Cqz2.2 896.54,997 943.53,950 1160,950 1216,894 1311,894 1367.76,837.24 Uc.3
RST: BRst.1 CdRst.2 Rrst.2 Uc.4 | length 1449.3
  TopLayer w20: v1(1175,1310) 1175,1255.8 1108,1188.8 1108,1065.53 1150.53,1023 1238,1023 1280,1065 v1(1310,1065)
  BottomLayer w20: BRst.1 817.72,1249.53 817.72,1328.82 816.54,1330 831.72,1345.18 831.72,1460 962.91,1460 Rrst.2 1037.91,1375.16 1099.57,1313.5 1171.5,1313.5 v1(1175,1310) ; v1(1310,1065) 1310,946.82 1399.25,857.56 Uc.4
VCC: Cin.1 J_VCC.1 U5V.1 | length 591.6
  TopLayer w35: Cin.1@2460,1532.85 Cin.1@2460,1535
  BottomLayer w20: U5V.1 U5V.1@2303.46,1508.46 ; Cin.1@2443.46,1508.46 Cin.1
  BottomLayer w35: U5V.1 2327.85,1532.85 Cin.1@2460,1532.85
  BottomLayer w50: Cin.1@2460,1535 Cin.1
  BottomLayer w100: J_VCC.1 2470,1840 Cin.1@2470,1545.26
pads on no net: B0.3 B0.4 B1.3 B1.4 B2.3 B2.4 BRst.3 BRst.4 HC-05.1 HC-05.6 MPU6050.5 MPU6050.6 MPU6050.7 MPU6050.8 MPU6050.FIX PN532.2

## Polygon pours and split planes (outlines as drawn)
GND on BottomLayer "Bot-GND" (solid, remove dead copper, pour order 17): 34.39,1695.61 1719.39,1695.61 ccw(c1719.39,1745.61) 1769.39,1745.61 1769.39,1970.61 cw(c1869.39,1970.61) 1869.39,2070.61 2614.39,2070.61 cw(c2614.39,1990.61) 2694.39,1990.61 2694.39,1750.61 ccw(c2744.39,1750.61) 2744.39,1700.61 2794.39,1700.61 cw(c2794.39,1690.61) 2804.39,1690.61 2804.39,35.61 cw(c2789.39,35.61) 2789.39,20.61 29.39,20.61 cw(c29.39,30.61) 19.39,30.61 19.39,1680.61 cw(c34.39,1680.61)
GND on BottomLayer "BottomLayer-No Net" (solid, shelved, pour order 9): 480,2265 490,2275 2250,2275 2250,2545 2355,2650 3095,2650 3175,2570 3175,2280 3270,2280 3270,580 480,580
GND on TopLayer "Top-GND" (solid, remove dead copper, pour order 19): 35,1695 1720,1695 ccw(c1720,1745) 1770,1745 1770,1970 cw(c1870,1970) 1870,2070 2615,2070 cw(c2615,1990) 2695,1990 2695,1750 ccw(c2745,1750) 2745,1700 2795,1700 cw(c2795,1690) 2805,1690 2805,35 cw(c2790,35) 2790,20 30,20 cw(c30,30) 20,30 20,1680 cw(c35,1680)
no net on TopLayer "TopLayer-No Net" (solid, shelved, pour order 15): 480,2265 490,2275 2250,2275 2250,2545 2355,2650 3095,2650 3175,2570 3175,2280 3270,2280 3270,580 480,580
GND on TopLayer "TopLayer-No Net 1" (solid, shelved, pour order 13): 505,2280
no net on TopLayer "TopLayer-No Net 2" (solid, shelved, pour order 11): 510,2270
no net on TopLayer "TopLayer-No Net 3" (solid, shelved, pour order 7): 535,2265

## Other copper
TopLayer:

## Silkscreen, mask and mechanical layers (free items; w line width, h text height)
TopOverlay:
  text "- PAGET-MIOT--SALLES Milovan" at 190,555 h30 r90
  text "- PINEAU Thomas" at 240,525 h30 r90
  text "Tictac" at 225,265 h50 r90
  text "ESEO - 2025" at 2025,155 h50
BottomOverlay:
  text "- PAGET-MIOT--SALLES Milovan" at 2745,580 h30 r270
  text "- PINEAU Thomas" at 2685,550 h30 r270
  text "Tictac" at 2725,295 h50 r270
  text "ESEO - 2025" at 2560,80 h50
Mechanical1:
  lines w20: 2615.76,2080 1870,2080 ccw(c1870,1970) 1760,1970 1760,1745 cw(c1720,1745) 1720,1705 1715,1705 60,1705 ; 2616.47,2080 cw(c2615.76,1990.66) 2704.63,1981.46 2704.63,1753.02 ; 2704.64,1752.08 ccw(c2747.79,1753.02) 2748.73,1709.87 2795.13,1709.87 cw(c2795.13,1690) 2815,1690 2815,35 cw(c2790,35) 2790,10 30,10 cw(c30,30) 10,30 10,1680 cw(c35,1680) 35,1705 60,1705 ; 60,1705 ccw(c60,1705) 60,1705

## Text inside footprints (layer, text, board x,y; h text height)
Cin: BottomOverlay "+" at 2491.65,1644.45 h45 r90
Cout1: BottomOverlay "+" at 1788.35,1111.81 h45 r270
Cout4: BottomOverlay "+" at 1783.35,1343.15 h45 r270
Uc: BottomOverlay "*" at 1299.02,858.5 h50 r90; Mechanical7 "Default Horiz Padstyle: RX20Y58D0T" at 1842,1055 h50 r90; Mechanical7 "Default Vert Padstyle: RX20Y58D0T" at 1902,1042.5 h50 r90; Mechanical7 "Alt 1 Padstyle: OX60Y90D30P" at 2082,967.5 h50 r90; Mechanical7 "Alt 2 Padstyle: OX90Y60D30P" at 2142,967.5 h50 r90; Mechanical7 "0.031in/0.8mm" at 1333.01,333 h25 r90; Mechanical7 "0.03in/0.762mm" at 1118,555.5 h25 r90; Mechanical7 "0.354in/8.992mm" at 1043,723.75 h25 r90; Mechanical7 "0.276in/7.01mm" at 1737,717.5 h25 r90; Mechanical7 "0.276in/7.01mm" at 1427.5,1102 h25 r90; Mechanical7 "0.354in/8.992mm" at 1427.5,258 h25 r90; Mechanical13 "*" at 1314.02,765.5 h50 r90